# Altium PCB 1.PcbDoc (part 3 of 3)
Units mm, origin at the board's own origin, x right, y up, seen from the top; angles counter-clockwise.
Board outline 233.04 x 114.81 mm, 2 copper layers (Top Layer, Bottom Layer); 326 components, 324 nets, 1073 pads, 126 vias.
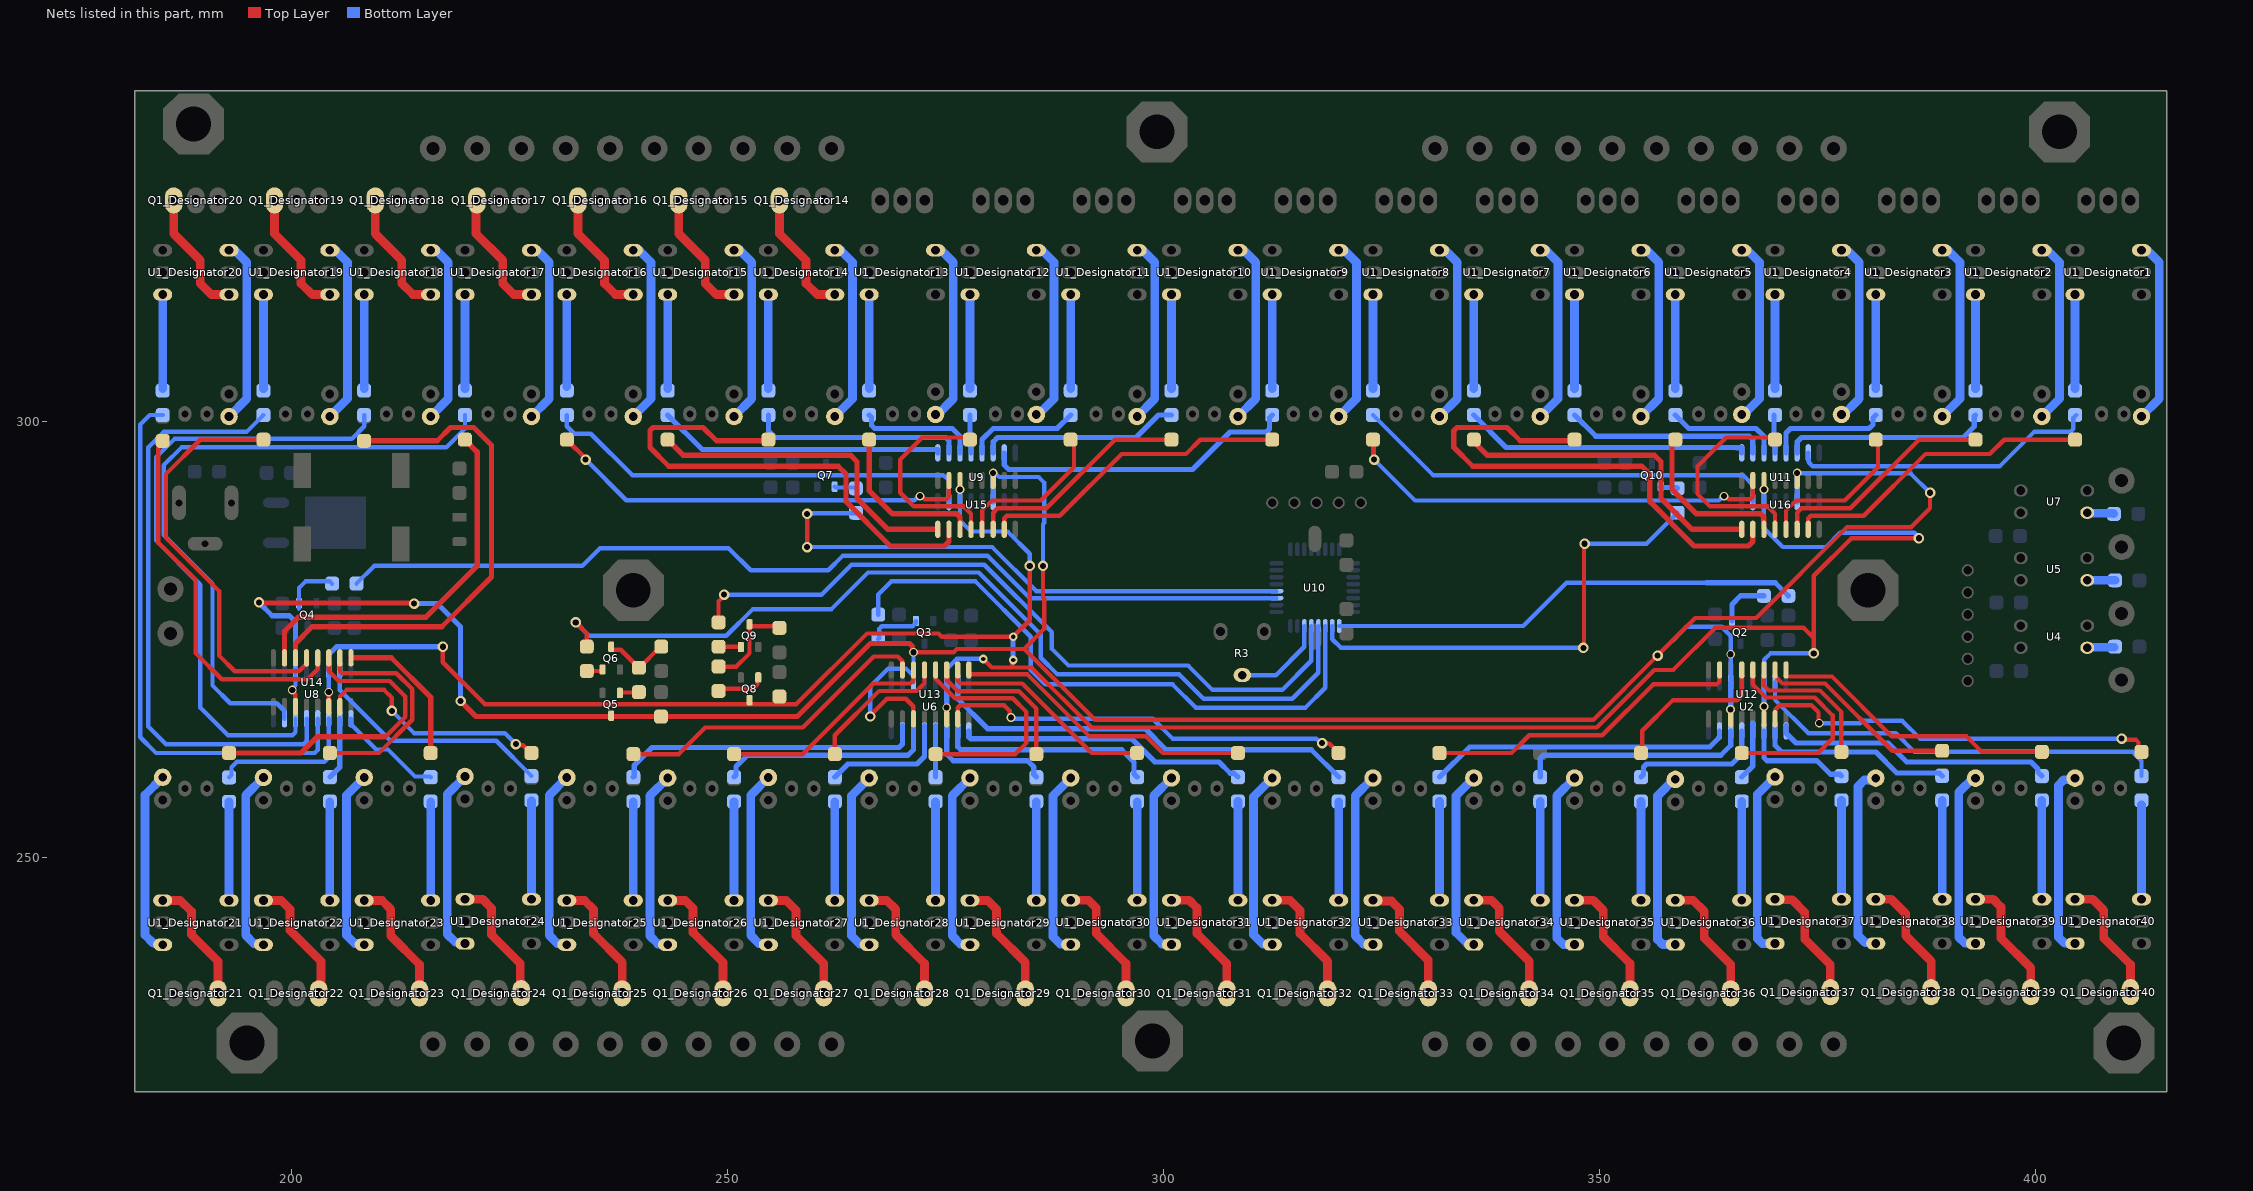
[diagram p3: the nets of this part, all layers, seen from the top]

## Via types
v1: diameter 1.2, hole 0.7, Top Layer to Bottom Layer, 83 vias
v2: diameter 1, hole 0.7, Top Layer to Bottom Layer, 40 vias
v3: diameter 1, hole 0.5, Top Layer to Bottom Layer, 3 vias

## Nets (pads, with @x,y where several pads share a name; then routed paths per layer and width w, separated by ;. In a path a pad name is that pad's centre, name@x,y a point inside that pad or via, vN(x,y) a via of type N, cw(c..) or ccw(c..) an arc to the next point about the centre after c; other vN are vias at no path point) (continued)
NetQ1_Designator14_3: Q1_Designator14.3 U1_Designator14.6 | length 14.5
  Top Layer w1: Q1_Designator14.3@255.905,325.235 255.905,321.552 258.953,318.504 258.953,315.849 260.223,314.579 U1_Designator14.6@262.255,314.579
NetQ1_Designator15_3: Q1_Designator15.3 U1_Designator15.6 | length 14.5
  Top Layer w1: Q1_Designator15.3@244.348,325.235 244.348,321.552 247.396,318.504 247.396,315.849 248.666,314.579 U1_Designator15.6@250.698,314.579
NetQ1_Designator16_3: Q1_Designator16.3 U1_Designator16.6 | length 14.5
  Top Layer w1: Q1_Designator16.3@232.791,325.235 232.791,321.552 235.839,318.504 235.839,315.849 237.109,314.579 U1_Designator16.6@239.141,314.579
NetQ1_Designator17_3: Q1_Designator17.3 U1_Designator17.6 | length 14.5
  Top Layer w1: Q1_Designator17.3@221.107,325.235 221.107,321.552 224.155,318.504 224.155,315.849 225.425,314.579 U1_Designator17.6@227.457,314.579
NetQ1_Designator18_3: Q1_Designator18.3 U1_Designator18.6 | length 14.5
  Top Layer w1: Q1_Designator18.3@209.55,325.235 209.55,321.552 212.598,318.504 212.598,315.849 213.868,314.579 U1_Designator18.6@215.9,314.579
NetQ1_Designator19_3: Q1_Designator19.3 U1_Designator19.6 | length 14.5
  Top Layer w1: Q1_Designator19.3@197.993,325.235 197.993,321.552 201.041,318.504 201.041,315.849 202.311,314.579 U1_Designator19.6@204.343,314.579
NetQ1_Designator20_3: Q1_Designator20.3 U1_Designator20.6 | length 14.5
  Top Layer w1: Q1_Designator20.3@186.436,325.235 186.436,321.552 189.484,318.504 189.484,315.849 190.754,314.579 U1_Designator20.6@192.786,314.579
NetQ1_Designator21_3: Q1_Designator21.3 U1_Designator21.6 | length 14.5
  Top Layer w1: U1_Designator21.6@185.166,245.098 187.198,245.098 188.468,243.828 188.468,241.173 191.516,238.125 Q1_Designator21.3@191.516,234.442
NetQ1_Designator22_3: Q1_Designator22.3 U1_Designator22.6 | length 14.7
  Top Layer w1: U1_Designator22.6@196.723,245.098 198.755,245.098 199.771,244.082 199.771,241.681 203.327,238.125 203.327,235.903 203.264,235.84 203.264,234.633 Q1_Designator22.3@203.073,234.442
NetQ1_Designator23_3: Q1_Designator23.3 U1_Designator23.6 | length 14.5
  Top Layer w1: U1_Designator23.6@208.28,245.098 210.312,245.098 211.328,244.082 211.328,241.046 214.63,237.744 Q1_Designator23.3@214.63,234.442
NetQ1_Designator24_3: Q1_Designator24.3 U1_Designator24.6 | length 14.5
  Top Layer w1: U1_Designator24.6@219.837,245.225 221.869,245.225 222.885,244.209 222.885,241.173 226.187,237.871 Q1_Designator24.3@226.187,234.569
NetQ1_Designator25_3: Q1_Designator25.3 U1_Designator25.6 | length 14.5
  Top Layer w1: U1_Designator25.6@231.521,245.098 233.553,245.098 234.569,244.082 234.569,241.3 237.871,237.998 Q1_Designator25.3@237.871,234.442
NetQ1_Designator26_3: Q1_Designator26.3 U1_Designator26.6 | length 14.5
  Top Layer w1: U1_Designator26.6@243.078,245.098 245.11,245.098 245.999,244.209 245.999,241.427 249.428,237.998 Q1_Designator26.3@249.428,234.442
NetQ1_Designator27_3: Q1_Designator27.3 U1_Designator27.6 | length 14.5
  Top Layer w1: U1_Designator27.6@254.635,245.098 256.667,245.098 257.81,243.955 257.81,241.046 260.985,237.871 Q1_Designator27.3@260.985,234.442
NetQ1_Designator28_3: Q1_Designator28.3 U1_Designator28.6 | length 14.5
  Top Layer w1: U1_Designator28.6@266.192,245.098 268.224,245.098 269.24,244.082 269.24,241.173 272.542,237.871 Q1_Designator28.3@272.542,234.442
NetQ1_Designator29_3: Q1_Designator29.3 U1_Designator29.6 | length 14.5
  Top Layer w1: U1_Designator29.6@277.749,245.098 279.781,245.098 280.797,244.082 280.797,241.3 284.099,237.998 Q1_Designator29.3@284.099,234.442
NetQ1_Designator30_3: Q1_Designator30.3 U1_Designator30.6 | length 14.5
  Top Layer w1: U1_Designator30.6@289.306,245.11 291.338,245.11 292.227,244.221 292.227,241.3 295.656,237.871 Q1_Designator30.3@295.656,234.454
NetQ1_Designator31_3: Q1_Designator31.3 U1_Designator31.6 | length 14.5
  Top Layer w1: U1_Designator31.6@300.863,245.11 302.895,245.11 303.784,244.221 303.784,241.3 307.213,237.871 Q1_Designator31.3@307.213,234.454
NetQ1_Designator32_3: Q1_Designator32.3 U1_Designator32.6 | length 14.5
  Top Layer w1: U1_Designator32.6@312.42,245.11 314.452,245.11 315.595,243.967 315.595,241.3 318.77,238.125 Q1_Designator32.3@318.77,234.454
NetQ1_Designator33_3: Q1_Designator33.3 U1_Designator33.6 | length 14.2
  Top Layer w1: U1_Designator33.6@324.231,245.11 324.308,245.033 326.086,245.033 327.025,244.094 327.025,241.554 330.327,238.252 Q1_Designator33.3@330.327,234.442
NetQ1_Designator34_3: Q1_Designator34.3 U1_Designator34.6 | length 14.5
  Top Layer w1: U1_Designator34.6@335.534,245.11 337.566,245.11 338.455,244.221 338.455,241.554 341.884,238.125 Q1_Designator34.3@341.884,234.454
NetQ1_Designator35_3: Q1_Designator35.3 U1_Designator35.6 | length 14.3
  Top Layer w1: U1_Designator35.6@347.345,245.11 349.25,245.11 350.393,243.967 350.393,240.919 353.441,237.871 Q1_Designator35.3@353.441,234.442
NetQ1_Designator36_3: Q1_Designator36.3 U1_Designator36.6 | length 14.5
  Top Layer w1: U1_Designator36.6@358.648,245.11 360.68,245.11 361.95,243.84 361.95,240.792 364.998,237.744 Q1_Designator36.3@364.998,234.454
NetQ1_Designator37_3: Q1_Designator37.3 U1_Designator37.6 | length 14.4
  Top Layer w1: U1_Designator37.6@370.078,245.237 370.155,245.16 372.06,245.16 373.507,243.713 373.507,240.665 376.428,237.744 Q1_Designator37.3@376.428,234.581
NetQ1_Designator38_3: Q1_Designator38.3 U1_Designator38.6 | length 14.3
  Top Layer w1: U1_Designator38.6@381.635,245.237 383.413,245.237 385.064,243.586 385.064,241.046 387.985,238.125 Q1_Designator38.3@387.985,234.581
NetQ1_Designator39_3: Q1_Designator39.3 U1_Designator39.6 | length 14.5
  Top Layer w1: U1_Designator39.6@393.065,245.237 395.097,245.237 395.986,244.348 395.986,240.792 399.415,237.363 Q1_Designator39.3@399.415,234.581
NetQ1_Designator40_3: Q1_Designator40.3 U1_Designator40.6 | length 14.5
  Top Layer w1: U1_Designator40.6@404.495,245.237 406.527,245.237 407.797,243.967 407.797,240.792 410.845,237.744 Q1_Designator40.3@410.845,234.581
NetQ2_1: Q2.1 R12.1 | length 6
  Bottom Layer w0.6: Q2.1@365.141,277.144 365.141,279.035 366.141,280.035 R12.1@368.805,280.035
NetQ3_1: Q3.1 R14.1 | length 5.9
  Bottom Layer w0.5: R14.1@267.233,275.078 267.335,275.18 267.335,276.235 267.628,276.528 271.176,276.528 271.542,276.894 Q3.1@271.542,277.144
NetQ4_1: Q4.1 R18.1 | length 6.6
  Bottom Layer w0.5: 200.803,278.541 Q4.1@200.803,279.176 200.803,280.94 201.549,281.686 204.34,281.686 R18.1@204.594,281.432
NetQ5_1: Q5.1 R19.1 | length 2.2
  Top Layer w0.5: Q5.1@237.601,268.889 237.648,268.936 239.729,268.936 R19.1@239.776,268.983
NetQ5_3: Q5.3 R16.2 U2.11 U6.11 U8.11 U9.11 U11.11 U12.11 U13.11 U14.11 U15.11 U16.11 | length 325.3
  Top Layer w0.5: v2(200.025,269.24) 200.025,269.105 200.387,268.743 200.387,267.342 U14.11@200.406,267.323 ; v1(266.319,266.192) 266.319,266.319 268.224,268.224 270.383,268.224 271.253,267.354 271.253,265.945 U13.11@271.272,265.926 ; v2(271.272,273.558) 275.875,273.558 276.256,273.939 283.972,273.939 ; v1(286.131,283.464) 286.131,279.84 286.258,279.713 286.258,276.225 283.972,273.939 ; v1(387.858,291.846) 387.858,290.068 385.699,287.909 378.333,287.909 367.919,277.495 360.934,277.495 v1(356.616,273.177) 349.25,265.811 292.1,265.811 283.972,273.939
  Top Layer w0.6: v1(196.215,279.273) 196.278,279.209 213.931,279.209 v1(213.995,279.146) ; v1(219.329,267.97) 221.107,266.192 236.601,266.192 239.776,266.192 257.937,266.192 266.319,274.574 270.806,274.574 271.157,274.223 271.157,273.673 v2(271.272,273.558)
  Bottom Layer w0.5: v2(200.025,269.24) 200.025,269.375 200.406,269.756 U8.11@200.406,271.532 ; v1(266.319,266.192) 266.319,269.624 268.38,271.685 270.422,271.685 U6.11@271.272,270.835 ; U6.11@271.272,270.135 U6.11@271.272,270.835 ; v2(271.272,273.558) U6.11@271.272,270.835 ; v2(280.416,294.132) 280.624,294.132 281.093,293.663 285.626,293.663 286.258,293.031 286.258,288.379 286.131,288.252 v1(286.131,283.464) ; v1(356.616,273.177) 359.918,276.479 363.964,276.479 365.004,275.438 365.004,273.332 v2(364.998,273.326) ; U2.11@364.998,270.135 364.998,273.32 v2@365.004,273.326 ; v2(372.618,294.132) 372.676,294.074 385.63,294.074 v1(387.858,291.846)
  Bottom Layer w0.6: v1(196.215,279.273) 197.739,277.749 199.696,277.749 200.406,277.039 U8.11@200.406,271.532 ; v1(213.995,279.146) 216.662,279.146 219.329,276.479 v1(219.329,267.97) ; U9.11@280.416,290.824 v2(280.416,294.132) ; v2(364.971,266.988) 364.998,267.014 U2.11@364.998,270.135 ; U11.11@372.618,290.824 v2(372.618,294.132)
NetQ6_1: Q6.1 R21.1 | length 1.9
  Top Layer w0.5: R21.1@233.807,271.407 235.501,271.407 235.601,271.507 Q6.1@235.601,271.579
NetQ6_3: Q6.3 R17.2 R19.2 | length 7.9
  Top Layer w0.5: Q6.3@236.601,274.179 236.601,273.958 236.701,273.858 237.701,273.858 R19.2@239.776,271.783 239.85,271.783 242.274,274.207 R17.2@242.348,274.207
NetQ7_1: Q7.1 R24.1 | length 2.5
  Bottom Layer w0.5: Q7.1@262.239,292.548 262.336,292.451 264.571,292.451 R24.1@264.668,292.354
NetQ8_1: Q8.1 R26.1 | length 5.6
  Top Layer w0.5: R26.1@248.92,269.113 249.174,269.367 252.857,269.367 253.376,269.886 253.376,270.567 Q8.1@253.476,270.667
NetQ8_3: Q8.3 R23.2 U2.14 U6.14 U8.14 U9.14 U11.14 U12.14 U13.14 U14.14 U15.14 U16.14 | length 290.2
  Top Layer w0.5: U14.14@204.216,267.323 v2(204.216,268.986) ; v1(217.297,274.193) 217.297,272.415 222.123,267.589 257.81,267.589 265.938,275.717 274.139,275.717 274.52,275.336 v3(282.702,275.336) 284.607,277.241 v1(284.607,283.464) ; v3(279.273,272.789) 280.244,271.818 282.534,271.818 ; v3(282.702,272.669) 282.609,272.576 282.609,271.994 282.534,271.919 282.534,271.818 ; v1(374.523,273.431) 374.523,275.209 ; v1(386.588,286.639) 378.841,286.639 374.523,282.321 374.523,275.209 ; 282.534,271.818 284.823,271.818 291.719,264.922 349.631,264.922 356.235,271.526 358.394,271.526 363.22,276.352 373.38,276.352 374.523,275.209
  Bottom Layer w0.5: v2(204.216,268.986) U8.14@204.216,271.532 ; U6.14@275.082,270.135 275.082,271.653 276.225,272.796 279.266,272.796 v3(279.273,272.789) ; v2(276.606,292.227) U9.14@276.606,290.824 276.606,288.671 277.876,287.401 282.067,287.401 284.607,284.861 v1(284.607,283.464) ; U2.14@368.808,270.135 368.827,270.154 368.827,272.688 369.57,273.431 v1(374.523,273.431) ; v2(368.808,292.227) U11.14@368.808,290.824 368.808,287.782 370.967,285.623 375.92,285.623 377.571,287.274 386.045,287.274 386.588,286.731 v1(386.588,286.639)
  Bottom Layer w0.6: U8.14@204.216,271.532 204.216,273.304 205.105,274.193 v1(217.297,274.193) ; v2(275.082,267.208) U6.14@275.082,270.135 ; v3(282.702,272.669) v3(282.702,275.336) ; v2(368.808,267.335) U2.14@368.808,270.135
NetQ9_1: Q9.1 R27.1 | length 2.6
  Top Layer w0.5: R27.1@248.92,274.19 248.934,274.177 251.462,274.177 Q9.1@251.476,274.163
NetQ9_3: Q9.3 R25.2 R26.2 | length 11.1
  Top Layer w0.5: R26.2@248.92,271.913 250.958,271.913 252.476,273.431 Q9.3@252.476,276.763 ; Q9.3@252.476,276.659 252.576,276.559 255.701,276.559 R25.2@255.905,276.355
NetQ10_1: Q10.1 R29.1 | length 2
  Bottom Layer w0.6: Q10.1@356.981,292.578 356.981,292.519 357.031,292.469 358.793,292.469 R29.1@358.902,292.36
NetR1_Designator1_1: R1_Designator1.1 U1_Designator1.1 | length 10.8
  Bottom Layer w1: R1_Designator1.1@404.495,303.773 U1_Designator1.1@404.495,314.579
NetR1_Designator1_2: R1_Designator1.2 U11.7 | length 35.2
  Bottom Layer w0.5: U11.7@373.888,296.424 373.888,295.697 373.938,295.647 373.938,295.352 374.416,294.874 395.839,294.874 399.796,298.831 403.948,298.831 404.299,299.182 404.299,300.444 R1_Designator1.2@404.622,300.767
NetR1_Designator2_1: R1_Designator2.1 U1_Designator2.1 | length 10.8
  Bottom Layer w1: R1_Designator2.1@393.065,303.773 U1_Designator2.1@393.065,314.579
NetR1_Designator2_2: R1_Designator2.2 U11.6 | length 23.7
  Bottom Layer w0.6: U11.6@372.618,296.424 372.618,297.688 373.126,298.196 391.668,298.196 392.933,299.461 392.933,300.635 R1_Designator2.2@393.065,300.767
NetR1_Designator3_1: R1_Designator3.1 U1_Designator3.1 | length 10.8
  Bottom Layer w1: R1_Designator3.1@381.635,303.773 U1_Designator3.1@381.635,314.579
NetR1_Designator3_2: R1_Designator3.2 U11.5 | length 13.9
  Bottom Layer w0.6: U11.5@371.348,296.424 371.348,298.704 371.856,299.212 380.873,299.212 381.312,299.651 381.312,300.444 R1_Designator3.2@381.635,300.767
NetR1_Designator4_1: R1_Designator4.1 U1_Designator4.1 | length 10.8
  Bottom Layer w1: R1_Designator4.1@370.078,303.773 U1_Designator4.1@370.078,314.579
NetR1_Designator4_2: R1_Designator4.2 U11.4 | length 4.4
  Bottom Layer w0.6: R1_Designator4.2@369.951,300.767 369.951,297.251 370.078,297.124 U11.4@370.078,296.424
NetR1_Designator5_1: R1_Designator5.1 U1_Designator5.1 | length 10.8
  Bottom Layer w1: R1_Designator5.1@358.648,303.773 U1_Designator5.1@358.648,314.579
NetR1_Designator5_2: R1_Designator5.2 U11.3 | length 13.1
  Bottom Layer w0.6: R1_Designator5.2@358.648,300.767 360.182,299.233 367.898,299.233 368.808,298.323 U11.3@368.808,296.424
NetR1_Designator6_1: R1_Designator6.1 U1_Designator6.1 | length 10.8
  Bottom Layer w1: R1_Designator6.1@347.091,303.773 U1_Designator6.1@347.091,314.579
NetR1_Designator6_2: R1_Designator6.2 U11.2 | length 23.1
  Bottom Layer w0.6: R1_Designator6.2@347.091,300.767 349.535,298.323 367.157,298.323 367.538,297.942 U11.2@367.538,296.424
NetR1_Designator7_1: R1_Designator7.1 U1_Designator7.1 | length 10.8
  Bottom Layer w1: R1_Designator7.1@335.534,303.773 U1_Designator7.1@335.534,314.579
NetR1_Designator7_2: R1_Designator7.2 U11.1 | length 32.9
  Bottom Layer w0.6: R1_Designator7.2@335.534,300.767 339.248,297.053 365.639,297.053 365.669,297.023 366.268,297.023 U11.1@366.268,296.424
NetR1_Designator8_1: R1_Designator8.1 U1_Designator8.1 | length 10.8
  Bottom Layer w1: R1_Designator8.1@323.977,303.773 U1_Designator8.1@323.977,314.579
NetR1_Designator8_2: R1_Designator8.2 U11.15 | length 48.8
  Bottom Layer w0.5: R1_Designator8.2@323.977,300.767 330.866,293.878 366.395,293.878 367.538,292.735 U11.15@367.538,290.824
NetR1_Designator9_1: R1_Designator9.1 U1_Designator9.1 | length 10.8
  Bottom Layer w1: R1_Designator9.1@312.42,303.773 U1_Designator9.1@312.42,314.579
NetR1_Designator9_2: R1_Designator9.2 U9.7 | length 35.7
  Bottom Layer w0.6: U9.7@281.686,296.424 281.686,295.021 282.194,294.513 303.276,294.513 307.594,298.831 311.746,298.831 312.097,299.182 312.097,300.444 R1_Designator9.2@312.42,300.767
NetR1_Designator10_1: R1_Designator10.1 U1_Designator10.1 | length 10.8
  Bottom Layer w1: R1_Designator10.1@300.863,303.773 U1_Designator10.1@300.863,314.579
NetR1_Designator10_2: R1_Designator10.2 U9.6 | length 23
  Bottom Layer w0.6: U9.6@280.416,296.424 280.416,297.688 280.924,298.196 296.796,298.196 299.367,300.767 R1_Designator10.2@300.863,300.767
NetR1_Designator11_1: R1_Designator11.1 U1_Designator11.1 | length 10.8
  Bottom Layer w1: R1_Designator11.1@289.306,303.773 U1_Designator11.1@289.306,314.579
NetR1_Designator11_2: R1_Designator11.2 U9.5 | length 12.8
  Bottom Layer w0.6: U9.5@279.146,296.424 279.146,297.942 280.416,299.212 287.751,299.212 R1_Designator11.2@289.306,300.767
NetR1_Designator12_1: R1_Designator12.1 U1_Designator12.1 | length 10.8
  Bottom Layer w1: R1_Designator12.1@277.749,303.773 U1_Designator12.1@277.749,314.579
NetR1_Designator12_2: R1_Designator12.2 U9.4 | length 4.4
  Bottom Layer w0.6: R1_Designator12.2@277.749,300.767 277.749,297.251 277.876,297.124 U9.4@277.876,296.424
NetR1_Designator13_1: R1_Designator13.1 U1_Designator13.1 | length 10.8
  Bottom Layer w1: R1_Designator13.1@266.192,303.773 U1_Designator13.1@266.192,314.579
NetR1_Designator13_2: R1_Designator13.2 U9.3 | length 13.9
  Bottom Layer w0.6: R1_Designator13.2@266.192,300.767 266.451,300.508 266.451,299.588 266.827,299.212 275.717,299.212 276.606,298.323 U9.3@276.606,296.424
NetR1_Designator14_1: R1_Designator14.1 U1_Designator14.1 | length 10.8
  Bottom Layer w1: R1_Designator14.1@254.635,303.773 U1_Designator14.1@254.635,314.579
NetR1_Designator14_2: R1_Designator14.2 U9.2 | length 24.4
  Bottom Layer w0.6: R1_Designator14.2@254.635,300.767 254.635,298.958 255.397,298.196 274.985,298.196 275.336,297.845 U9.2@275.336,296.424
NetR1_Designator15_1: R1_Designator15.1 U1_Designator15.1 | length 10.8
  Bottom Layer w1: R1_Designator15.1@243.078,303.773 U1_Designator15.1@243.078,314.579
NetR1_Designator15_2: R1_Designator15.2 U9.1 | length 33
  Bottom Layer w0.6: R1_Designator15.2@243.078,300.767 247.046,296.799 274.066,296.799 U9.1@274.066,296.424
NetR1_Designator16_1: R1_Designator16.1 U1_Designator16.1 | length 10.8
  Bottom Layer w1: R1_Designator16.1@231.521,304.027 U1_Designator16.1@231.521,314.833
NetR1_Designator16_2: R1_Designator16.2 U9.15 | length 50.1
  Bottom Layer w0.5: R1_Designator16.2@231.521,300.767 231.521,299.466 232.365,298.622 234.27,298.622 239.014,293.878 274.701,293.878 275.336,293.243 U9.15@275.336,290.824
NetR1_Designator17_1: R1_Designator17.1 U1_Designator17.1 | length 10.8
  Bottom Layer w1: R1_Designator17.1@219.837,303.773 U1_Designator17.1@219.837,314.579
NetR1_Designator17_2: R1_Designator17.2 U8.7 | length 75.8
  Bottom Layer w0.5: U8.7@199.136,265.932 199.117,265.951 199.117,266.846 198.247,267.716 192.913,267.716 190.881,269.748 190.881,281.432 185.293,287.02 185.293,295.021 187.325,297.053 217.678,297.053 219.837,299.212 R1_Designator17.2@219.837,300.767
NetR1_Designator18_1: R1_Designator18.1 U1_Designator18.1 | length 10.8
  Bottom Layer w1: R1_Designator18.1@208.28,303.773 U1_Designator18.1@208.28,314.579
NetR1_Designator18_2: R1_Designator18.2 U8.6 | length 71.4
  Bottom Layer w0.5: U8.6@200.406,265.932 200.406,264.384 200.055,264.033 192.659,264.033 189.484,267.208 189.484,281.305 184.404,286.385 184.404,295.91 186.525,298.031 206.845,298.031 208.28,299.466 R1_Designator18.2@208.28,300.767
NetR1_Designator19_1: R1_Designator19.1 U1_Designator19.1 | length 10.8
  Bottom Layer w1: R1_Designator19.1@196.723,303.773 U1_Designator19.1@196.723,314.579
NetR1_Designator19_2: R1_Designator19.2 U8.5 | length 68.5
  Bottom Layer w0.5: R1_Designator19.2@196.723,300.767 194.787,298.831 185.293,298.831 183.515,297.053 183.515,265.049 185.547,263.017 201.325,263.017 201.676,263.368 U8.5@201.676,265.932
NetR1_Designator20_1: R1_Designator20.1 U1_Designator20.1 | length 10.8
  Bottom Layer w1: R1_Designator20.1@185.166,303.773 U1_Designator20.1@185.166,314.579
NetR1_Designator20_2: R1_Designator20.2 U8.4 | length 63.7
  Bottom Layer w0.5: R1_Designator20.2@185.166,300.767 183.673,300.767 182.588,299.682 182.588,263.817 184.404,262.001 202.595,262.001 202.946,262.352 U8.4@202.946,265.932
NetR1_Designator21_1: R1_Designator21.1 U1_Designator21.1 | length 11.3
  Bottom Layer w1: U1_Designator21.1@192.786,245.098 R1_Designator21.1@192.786,256.41
NetR1_Designator21_2: R1_Designator21.2 U8.3 | length 17.3
  Bottom Layer w0.5: R1_Designator21.2@192.786,259.21 193.062,259.486 193.062,260.372 193.675,260.985 203.708,260.985 204.216,261.493 U8.3@204.216,265.932
NetR1_Designator22_1: R1_Designator22.1 U1_Designator22.1 | length 11.3
  Bottom Layer w1: U1_Designator22.1@204.343,245.098 R1_Designator22.1@204.343,256.41
NetR1_Designator22_2: R1_Designator22.2 U8.2 | length 7.2
  Bottom Layer w0.6: R1_Designator22.2@204.343,259.24 205.486,260.383 U8.2@205.486,265.932
NetR1_Designator23_1: R1_Designator23.1 U1_Designator23.1 | length 11.3
  Bottom Layer w1: U1_Designator23.1@215.9,245.098 R1_Designator23.1@215.9,256.41
NetR1_Designator23_2: R1_Designator23.2 U8.1 | length 12.3
  Bottom Layer w0.5: U8.1@206.756,265.932 206.756,265.259 206.802,265.213 206.846,265.213 209.66,262.399 211.014,262.399 214.1,259.312 215.828,259.312 R1_Designator23.2@215.9,259.24
NetR1_Designator24_1: R1_Designator24.1 U1_Designator24.1 | length 11.3
  Bottom Layer w1: U1_Designator24.1@227.457,245.225 R1_Designator24.1@227.457,256.537
NetR1_Designator24_2: R1_Designator24.2 U8.15 | length 28.4
  Bottom Layer w0.5: U8.15@205.486,271.532 205.486,269.215 211.303,263.398 223.426,263.398 R1_Designator24.2@227.457,259.367
NetR1_Designator25_1: R1_Designator25.1 U1_Designator25.1 | length 11.3
  Bottom Layer w1: U1_Designator25.1@239.141,245.098 R1_Designator25.1@239.141,256.41
NetR1_Designator25_2: R1_Designator25.2 U6.7 | length 35.3
  Bottom Layer w0.6: R1_Designator25.2@239.141,259.24 239.242,259.341 239.242,260.578 241.3,262.636 269.621,262.636 270.002,263.017 U6.7@270.002,265.17
NetR1_Designator26_1: R1_Designator26.1 U1_Designator26.1 | length 11.3
  Bottom Layer w1: U1_Designator26.1@250.698,245.098 R1_Designator26.1@250.698,256.41
NetR1_Designator26_2: R1_Designator26.2 U6.6 | length 25.2
  Bottom Layer w0.6: R1_Designator26.2@250.698,259.24 250.926,259.468 250.926,260.451 252.211,261.736 270.626,261.736 271.272,262.382 U6.6@271.272,265.17
NetR1_Designator27_1: R1_Designator27.1 U1_Designator27.1 | length 11.3
  Bottom Layer w1: U1_Designator27.1@262.255,245.098 R1_Designator27.1@262.255,256.41
NetR1_Designator27_2: R1_Designator27.2 U6.5 | length 14.8
  Bottom Layer w0.6: R1_Designator27.2@262.255,259.24 263.746,260.731 265.52,260.731 265.529,260.74 271.662,260.74 272.542,261.62 U6.5@272.542,265.17
NetR1_Designator28_1: R1_Designator28.1 U1_Designator28.1 | length 11.3
  Bottom Layer w1: U1_Designator28.1@273.812,245.098 R1_Designator28.1@273.812,256.41
NetR1_Designator28_2: R1_Designator28.2 U6.4 | length 5.9
  Bottom Layer w0.6: R1_Designator28.2@273.812,259.24 U6.4@273.812,265.17
NetR1_Designator29_1: R1_Designator29.1 U1_Designator29.1 | length 11.3
  Bottom Layer w1: U1_Designator29.1@285.369,245.098 R1_Designator29.1@285.369,256.41
NetR1_Designator29_2: R1_Designator29.2 U6.3 | length 15.2
  Bottom Layer w0.6: U6.3@275.082,265.17 275.082,261.874 275.844,261.112 284.353,261.112 285.078,260.387 285.078,259.531 R1_Designator29.2@285.369,259.24
NetR1_Designator30_1: R1_Designator30.1 U1_Designator30.1 | length 11.3
  Bottom Layer w1: U1_Designator30.1@296.926,245.11 R1_Designator30.1@296.926,256.422
NetR1_Designator30_2: R1_Designator30.2 U6.2 | length 25.3
  Bottom Layer w0.6: U6.2@276.352,265.17 276.352,262.733 276.703,262.382 295.148,262.382 296.571,260.959 296.571,259.595 R1_Designator30.2@296.926,259.24
NetR1_Designator31_1: R1_Designator31.1 U1_Designator31.1 | length 11.3
  Bottom Layer w1: U1_Designator31.1@308.483,245.11 R1_Designator31.1@308.483,256.44
NetR1_Designator31_2: R1_Designator31.2 U6.1 | length 33.5
  Bottom Layer w0.6: U6.1@277.622,264.535 277.622,263.835 277.805,263.652 296.291,263.652 298.958,260.985 306.302,260.985 307.609,259.678 308.045,259.678 R1_Designator31.2@308.483,259.24
NetR1_Designator32_1: R1_Designator32.1 U1_Designator32.1 | length 11.3
  Bottom Layer w1: U1_Designator32.1@320.04,245.11 R1_Designator32.1@320.04,256.422
NetR1_Designator32_2: R1_Designator32.2 U6.15 | length 50
  Bottom Layer w0.6: U6.15@276.352,270.77 276.352,268.224 279.781,264.795 280.144,264.795 280.158,264.781 281.182,264.781 281.196,264.795 297.815,264.795 300.228,262.382 316.898,262.382 R1_Designator32.2@320.04,259.24
NetR1_Designator33_1: R1_Designator33.1 U1_Designator33.1 | length 11.3
  Bottom Layer w1: U1_Designator33.1@331.597,245.11 R1_Designator33.1@331.597,256.44
NetR1_Designator33_2: R1_Designator33.2 U2.7 | length 34.7
  Bottom Layer w0.6: R1_Designator33.2@331.597,259.24 335.063,262.706 362.602,262.706 363.358,263.462 363.358,263.465 363.728,263.835 U2.7@363.728,264.535
NetR1_Designator34_1: R1_Designator34.1 U1_Designator34.1 | length 11.3
  Bottom Layer w1: U1_Designator34.1@343.154,245.11 R1_Designator34.1@343.154,256.44
NetR1_Designator34_2: R1_Designator34.2 U2.6 | length 26.2
  Bottom Layer w0.6: R1_Designator34.2@343.154,259.24 343.154,261.366 343.535,261.747 363.855,261.747 364.998,262.89 U2.6@364.998,264.535
NetR1_Designator35_1: R1_Designator35.1 U1_Designator35.1 | length 11.3
  Bottom Layer w1: U1_Designator35.1@354.711,245.11 R1_Designator35.1@354.711,256.44
NetR1_Designator35_2: R1_Designator35.2 U2.5 | length 15.8
  Bottom Layer w0.6: R1_Designator35.2@354.711,259.24 355.01,259.539 355.01,260.38 355.361,260.731 365.125,260.731 366.268,261.874 U2.5@366.268,264.535
NetR1_Designator36_1: R1_Designator36.1 U1_Designator36.1 | length 11.3
  Bottom Layer w1: U1_Designator36.1@366.268,245.11 R1_Designator36.1@366.268,256.44
NetR1_Designator36_2: R1_Designator36.2 U2.4 | length 6.7
  Bottom Layer w0.6: R1_Designator36.2@366.268,259.24 367.538,260.51 U2.4@367.538,265.418
NetR1_Designator37_1: R1_Designator37.1 U1_Designator37.1 | length 11.3
  Bottom Layer w1: U1_Designator37.1@377.698,245.237 R1_Designator37.1@377.698,256.567
NetR1_Designator37_2: R1_Designator37.2 U2.3 | length 12.8
  Bottom Layer w0.6: U2.3@368.808,264.535 368.808,261.463 369.159,261.112 374.904,261.112 376.454,259.562 377.503,259.562 R1_Designator37.2@377.698,259.367
NetR1_Designator38_1: R1_Designator38.1 U1_Designator38.1 | length 11.3
  Bottom Layer w1: U1_Designator38.1@389.255,245.237 R1_Designator38.1@389.255,256.549
NetR1_Designator38_2: R1_Designator38.2 U2.2 | length 23.2
  Bottom Layer w0.6: U2.2@370.078,265.418 370.078,262.89 370.851,262.117 381.646,262.117 384.048,259.715 388.907,259.715 R1_Designator38.2@389.255,259.367
NetR1_Designator39_1: R1_Designator39.1 U1_Designator39.1 | length 11.3
  Bottom Layer w1: U1_Designator39.1@400.685,245.237 R1_Designator39.1@400.685,256.567
NetR1_Designator39_2: R1_Designator39.2 U2.1 | length 32.5
  Bottom Layer w0.6: U2.1@371.348,265.17 371.348,264.287 372.491,263.144 383.032,263.144 385.191,260.985 399.431,260.985 400.247,260.169 400.247,259.805 R1_Designator39.2@400.685,259.367
NetR1_Designator40_1: R1_Designator40.1 U1_Designator40.1 | length 10.8
  Bottom Layer w1: U1_Designator40.1@412.115,245.237 R1_Designator40.1@412.115,256.043
NetR1_Designator40_2: R1_Designator40.2 U2.15 | length 48.7
  Bottom Layer w0.5: U2.15@370.078,270.135 370.078,268.097 373.888,264.287 383.921,264.287 386.08,262.128 411.099,262.128 412.115,261.112 R1_Designator40.2@412.115,259.367
NetR2_Designator1_1: R2_Designator1.1 U1_Designator1.4 | length 21.2
  Bottom Layer w1: R2_Designator1.1@412.115,300.588 414.147,302.62 414.147,318.301 412.827,319.622 412.192,319.622 U1_Designator1.4@412.115,319.698
NetR2_Designator2_1: R2_Designator2.1 U1_Designator2.4 | length 21.2
  Bottom Layer w1: R2_Designator2.1@400.685,300.588 402.717,302.62 402.717,318.301 401.397,319.622 400.762,319.622 U1_Designator2.4@400.685,319.698
NetR2_Designator3_1: R2_Designator3.1 U1_Designator3.4 | length 21.2
  Bottom Layer w1: R2_Designator3.1@389.255,300.588 391.287,302.62 391.287,318.301 389.967,319.622 389.332,319.622 U1_Designator3.4@389.255,319.698
NetR2_Designator4_1: R2_Designator4.1 U1_Designator4.4 | length 21.2
  Bottom Layer w1: R2_Designator4.1@377.698,300.588 379.73,302.62 379.73,318.301 378.41,319.622 377.775,319.622 U1_Designator4.4@377.698,319.698
NetR2_Designator5_1: R2_Designator5.1 U1_Designator5.4 | length 21.2
  Bottom Layer w1: R2_Designator5.1@366.268,300.588 368.3,302.62 368.3,318.301 366.98,319.622 366.345,319.622 U1_Designator5.4@366.268,319.698
NetR2_Designator6_1: R2_Designator6.1 U1_Designator6.4 | length 21.2
  Bottom Layer w1: R2_Designator6.1@354.711,300.588 356.743,302.62 356.743,318.301 355.423,319.622 354.788,319.622 U1_Designator6.4@354.711,319.698
NetR2_Designator7_1: R2_Designator7.1 U1_Designator7.4 | length 21.2
  Bottom Layer w1: R2_Designator7.1@343.154,300.588 345.186,302.62 345.186,318.301 343.866,319.622 343.231,319.622 U1_Designator7.4@343.154,319.698
NetR2_Designator8_1: R2_Designator8.1 U1_Designator8.4 | length 21.2
  Bottom Layer w1: R2_Designator8.1@331.597,300.588 333.629,302.62 333.629,318.301 332.309,319.622 331.674,319.622 U1_Designator8.4@331.597,319.698
NetR2_Designator9_1: R2_Designator9.1 U1_Designator9.4 | length 21.2
  Bottom Layer w1: R2_Designator9.1@320.04,300.588 322.072,302.62 322.072,318.301 320.752,319.622 320.117,319.622 U1_Designator9.4@320.04,319.698
NetR2_Designator10_1: R2_Designator10.1 U1_Designator10.4 | length 21.2
  Bottom Layer w1: R2_Designator10.1@308.483,300.588 310.515,302.62 310.515,318.301 309.195,319.622 308.56,319.622 U1_Designator10.4@308.483,319.698
NetR2_Designator11_1: R2_Designator11.1 U1_Designator11.4 | length 21.2
  Bottom Layer w1: R2_Designator11.1@296.926,300.588 298.958,302.62 298.958,318.301 297.638,319.622 297.003,319.622 U1_Designator11.4@296.926,319.698
NetR2_Designator12_1: R2_Designator12.1 U1_Designator12.4 | length 21.2
  Bottom Layer w1: R2_Designator12.1@285.369,300.588 287.401,302.62 287.401,318.301 286.081,319.622 285.446,319.622 U1_Designator12.4@285.369,319.698
NetR2_Designator13_1: R2_Designator13.1 U1_Designator13.4 | length 21.2
  Bottom Layer w1: R2_Designator13.1@273.812,300.588 275.844,302.62 275.844,318.301 274.524,319.622 273.889,319.622 U1_Designator13.4@273.812,319.698
NetR2_Designator14_1: R2_Designator14.1 U1_Designator14.4 | length 21.2
  Bottom Layer w1: R2_Designator14.1@262.255,300.588 264.287,302.62 264.287,318.301 262.967,319.622 262.332,319.622 U1_Designator14.4@262.255,319.698
NetR2_Designator15_1: R2_Designator15.1 U1_Designator15.4 | length 21.2
  Bottom Layer w1: R2_Designator15.1@250.698,300.588 252.73,302.62 252.73,318.301 251.41,319.622 250.775,319.622 U1_Designator15.4@250.698,319.698
NetR2_Designator16_1: R2_Designator16.1 U1_Designator16.4 | length 21.2
  Bottom Layer w1: R2_Designator16.1@239.141,300.588 241.173,302.62 241.173,318.301 239.853,319.622 239.218,319.622 U1_Designator16.4@239.141,319.698
NetR2_Designator17_1: R2_Designator17.1 U1_Designator17.4 | length 21.2
  Bottom Layer w1: R2_Designator17.1@227.457,300.588 229.489,302.62 229.489,318.301 228.169,319.622 227.534,319.622 U1_Designator17.4@227.457,319.698
NetR2_Designator18_1: R2_Designator18.1 U1_Designator18.4 | length 21.2
  Bottom Layer w1: R2_Designator18.1@215.9,300.588 217.932,302.62 217.932,318.301 216.612,319.622 215.977,319.622 U1_Designator18.4@215.9,319.698
NetR2_Designator19_1: R2_Designator19.1 U1_Designator19.4 | length 21.2
  Bottom Layer w1: R2_Designator19.1@204.343,300.588 206.375,302.62 206.375,318.301 205.055,319.622 204.42,319.622 U1_Designator19.4@204.343,319.698
NetR2_Designator20_1: R2_Designator20.1 U1_Designator20.4 | length 21.2
  Bottom Layer w1: R2_Designator20.1@192.786,300.588 194.818,302.62 194.818,318.301 193.498,319.622 192.863,319.622 U1_Designator20.4@192.786,319.698
NetR2_Designator21_1: R2_Designator21.1 U1_Designator21.4 | length 21.4
  Bottom Layer w1: U1_Designator21.4@185.166,240.108 185.089,240.184 184.073,240.184 183.134,241.124 183.134,257.186 R2_Designator21.1@185.166,259.218
NetR2_Designator22_1: R2_Designator22.1 U1_Designator22.4 | length 21.4
  Bottom Layer w1: U1_Designator22.4@196.723,240.083 196.646,240.159 195.63,240.159 194.691,241.099 194.691,257.161 R2_Designator22.1@196.723,259.193
NetR2_Designator23_1: R2_Designator23.1 U1_Designator23.4 | length 21.4
  Bottom Layer w1: U1_Designator23.4@208.28,240.083 208.203,240.159 207.187,240.159 206.248,241.099 206.248,257.161 R2_Designator23.1@208.28,259.193
NetR2_Designator24_1: R2_Designator24.1 U1_Designator24.4 | length 21.4
  Bottom Layer w1: U1_Designator24.4@219.837,240.21 219.76,240.286 218.744,240.286 217.805,241.226 217.805,257.288 R2_Designator24.1@219.837,259.32
NetR2_Designator25_1: R2_Designator25.1 U1_Designator25.4 | length 21.4
  Bottom Layer w1: U1_Designator25.4@231.521,240.083 231.444,240.159 230.428,240.159 229.489,241.099 229.489,257.161 R2_Designator25.1@231.521,259.193
NetR2_Designator26_1: R2_Designator26.1 U1_Designator26.4 | length 21.4
  Bottom Layer w1: U1_Designator26.4@243.078,240.03 243.001,240.106 241.985,240.106 241.046,241.046 241.046,257.108 R2_Designator26.1@243.078,259.14
NetR2_Designator27_1: R2_Designator27.1 U1_Designator27.4 | length 21.4
  Bottom Layer w1: U1_Designator27.4@254.635,240.083 254.558,240.159 253.542,240.159 252.603,241.099 252.603,257.161 R2_Designator27.1@254.635,259.193
NetR2_Designator28_1: R2_Designator28.1 U1_Designator28.4 | length 21.4
  Bottom Layer w1: U1_Designator28.4@266.192,240.03 266.115,240.106 265.099,240.106 264.16,241.046 264.16,257.108 R2_Designator28.1@266.192,259.14
NetR2_Designator29_1: R2_Designator29.1 U1_Designator29.4 | length 21.4
  Bottom Layer w1: U1_Designator29.4@277.749,240.03 277.672,240.107 276.656,240.107 275.717,241.046 275.717,257.108 R2_Designator29.1@277.749,259.14
NetR2_Designator30_1: R2_Designator30.1 U1_Designator30.4 | length 21.5
  Bottom Layer w1: U1_Designator30.4@289.306,240.03 289.272,240.064 288.129,240.064 287.274,240.919 287.274,257.108 R2_Designator30.1@289.306,259.14
NetR2_Designator31_1: R2_Designator31.1 U1_Designator31.4 | length 21.4
  Bottom Layer w1: U1_Designator31.4@300.863,240.03 300.786,240.107 299.77,240.107 298.831,241.046 298.831,257.108 R2_Designator31.1@300.863,259.14
NetR2_Designator32_1: R2_Designator32.1 U1_Designator32.4 | length 21.5
  Bottom Layer w1: U1_Designator32.4@312.42,240.03 312.343,240.107 311.327,240.107 310.261,241.173 310.261,256.981 R2_Designator32.1@312.42,259.14
NetR2_Designator33_1: R2_Designator33.1 U1_Designator33.4 | length 21.4
  Bottom Layer w1: U1_Designator33.4@323.977,240.03 323.9,240.107 322.884,240.107 321.945,241.046 321.945,257.108 R2_Designator33.1@323.977,259.14
NetR2_Designator34_1: R2_Designator34.1 U1_Designator34.4 | length 21.2
  Bottom Layer w1: U1_Designator34.4@335.534,240.03 335.457,240.107 334.822,240.107 333.502,241.427 333.502,257.108 R2_Designator34.1@335.534,259.14
NetR2_Designator35_1: R2_Designator35.1 U1_Designator35.4 | length 21.5
  Bottom Layer w1: U1_Designator35.4@347.091,240.03 345.821,240.03 345.059,240.792 345.059,257.108 R2_Designator35.1@347.091,259.14
NetR2_Designator36_1: R2_Designator36.1 U1_Designator36.4 | length 21.6
  Bottom Layer w1: U1_Designator36.4@358.648,240.03 357.202,240.03 356.616,240.616 356.616,257.108 R2_Designator36.1@358.648,259.14
NetR2_Designator37_1: R2_Designator37.1 U1_Designator37.4 | length 21.6
  Bottom Layer w1: U1_Designator37.4@370.078,240.157 368.632,240.157 368.046,240.743 368.046,257.235 R2_Designator37.1@370.078,259.267
NetR2_Designator38_1: R2_Designator38.1 U1_Designator38.4 | length 21.7
  Bottom Layer w1: R2_Designator38.1@381.411,259.11 381.352,259.11 381.147,258.905 380.317,258.905 379.611,258.199 379.611,241.038 380.415,240.234 381.558,240.234 U1_Designator38.4@381.635,240.157
NetR2_Designator39_1: R2_Designator39.1 U1_Designator39.4 | length 21.2
  Bottom Layer w1: R2_Designator39.1@392.841,259.169 391.16,257.488 391.16,240.889 391.873,240.176 393.046,240.176 U1_Designator39.4@393.065,240.157
NetR2_Designator40_1: R2_Designator40.1 U1_Designator40.4 | length 21.8
  Bottom Layer w1: R2_Designator40.1@404.271,259.267 404.271,259.169 404.033,258.931 403.201,258.931 402.59,258.321 402.59,240.889 403.303,240.176 404.476,240.176 U1_Designator40.4@404.495,240.157
NetR3_2: R3.2 U10.14 | length 10.8
  Bottom Layer w0.5: R3.2@308.991,270.931 312.841,270.931 316.103,274.193 U10.14@316.103,276.569
NetR5_2: R5.2 U4.1 | length 3.1
  Bottom Layer w1: U4.1@405.892,274.066 405.955,274.13 R5.2@409.001,274.13
NetR7_1: R7.1 U5.1 | length 3.2
  Bottom Layer w1: U5.1@405.892,281.817 405.894,281.815 409.062,281.815 R7.1@409.064,281.813
NetR10_1: R10.1 U7.1 | length 3.1
  Bottom Layer w1: U7.1@405.892,289.56 405.955,289.496 408.874,289.496 R10.1@408.937,289.433
NetR12_2: R12.2 U10.9 | length 54.2
  Bottom Layer w0.5: U10.9@320.103,276.569 341.212,276.569 346.169,281.526 362.221,281.526
  Bottom Layer w0.6: 362.221,281.526 370.114,281.526 R12.2@371.605,280.035
NetR14_2: R14.2 U10.11 | length 70.5
  Bottom Layer w0.5: R14.2@267.233,277.878 267.233,280.187 268.732,281.686 278.384,281.686 284.734,275.336 284.734,271.526 286.385,269.875 300.99,269.875 303.657,267.208 316.23,267.208 318.503,269.481 U10.11@318.503,276.569
NetR18_2: R18.2 U10.19 | length 110.9
  Bottom Layer w0.5: R18.2@207.394,281.432 209.426,283.464 233.299,283.464 235.331,285.496 250.063,285.496 252.603,282.956 261.493,282.956 263.144,284.607 279.781,284.607 284.619,279.769 U10.19@312.903,279.769
NetR21_2: R21.2 U10.12 | length 106.3
  Top Layer w0.5: v1(232.537,276.987) 233.807,275.717 R21.2@233.807,274.207
  Bottom Layer w0.5: v1(232.537,276.987) 234.061,275.463 249.809,275.463 252.857,278.511 261.874,278.511 266.065,282.702 278.765,282.702 285.877,275.59 285.877,272.923 287.782,271.018 301.752,271.018 304.546,268.224 314.706,268.224 317.703,271.221 U10.12@317.703,276.569
NetR24_2: R24.2 U10.20 | length 65.4
  Top Layer w0.5: v1(259.08,285.623) v1(259.08,289.433)
  Bottom Layer w0.5: v1(259.08,285.623) 280.289,285.623 285.343,280.569 U10.20@312.903,280.569 ; v1(259.08,289.433) 259.141,289.494 264.607,289.494 R24.2@264.668,289.554
NetR27_2: R27.2 U10.13 | length 84.6
  Top Layer w0.5: R27.2@248.92,276.99 248.92,279.392 249.555,280.027 v1(249.555,280.162)
  Bottom Layer w0.5: v1(249.555,280.162) 260.731,280.162 264.16,283.591 279.4,283.591 287.147,275.844 287.147,273.939 289.052,272.034 302.768,272.034 305.562,269.24 313.563,269.24 316.903,272.58 U10.13@316.903,276.569
NetR29_2: R29.2 U10.10 | length 54.9
  Top Layer w0.5: v1(348.107,274.066) 348.171,274.13 348.171,285.94 v1(348.234,286.004)
  Bottom Layer w0.5: U10.10@319.303,276.569 319.303,275.057 320.294,274.066 v1(348.107,274.066) ; v1(348.234,286.004) 355.346,286.004 R29.2@358.902,289.56
NetR30_2: R30.2 U12.15 | length 46.8
  Top Layer w0.5: U12.15@370.078,265.926 370.097,265.945 370.097,266.973 370.6,267.476 374.255,267.476 375.062,266.669 375.062,265.526 v2(375.158,265.43) ; v1(409.829,263.652) 409.976,263.505 411.477,263.505 411.769,263.212 411.769,262.477 R30.2@412.115,262.131
  Bottom Layer w0.5: v2(375.158,265.43) 379.861,265.43 380.115,265.684 384.683,265.684 386.715,263.652 v1(409.829,263.652)
NetR31_2: R31.2 U12.1 | length 32.9
  Top Layer w0.5: U12.1@371.348,270.77 376.617,270.77 383.481,263.906 392.049,263.906 393.824,262.131 R31.2@400.685,262.131
NetR32_2: R32.2 U12.2 | length 23.4
  Top Layer w0.5: U12.2@370.078,271.526 370.111,271.493 370.111,270.793 370.934,269.97 375.825,269.97 383.534,262.261 R32.2@389.255,262.261
NetR33_2: R33.2 U12.3 | length 15.7
  Top Layer w0.5: U12.3@368.808,270.77 368.808,269.748 369.386,269.17 375.228,269.17 377.698,266.7 R33.2@377.698,262.131
NetR34_2: R34.2 U12.4 | length 25.3
  Top Layer w0.5: R34.2@366.268,262.004 375.034,262.004 376.682,263.652 376.682,266.319 374.631,268.37 369.043,268.37 367.538,269.875 U12.4@367.538,270.77
NetR35_2: R35.2 U12.5 | length 17.9
  Top Layer w0.5: R35.2@354.711,262.004 354.86,262.153 354.86,264.563 358.335,268.038 365.74,268.038 366.268,268.566 U12.5@366.268,270.77
NetR37_2: R37.2 U12.7 | length 36.1
  Top Layer w0.5: R37.2@331.597,262.001 339.852,262.001 341.884,264.033 350.266,264.033 356.108,269.875 363.417,269.875 363.71,270.168 363.71,270.752 U12.7@363.728,270.77
NetR38_2: R38.2 U13.15 | length 47.7
  Top Layer w0.5: U13.15@276.352,265.926 276.352,267.183 276.645,267.476 281.672,267.476 282.314,266.834 282.314,266.199 v2(282.448,266.065) ; v1(318.135,263.144) 318.188,263.091 318.953,263.091 R38.2@320.04,262.004
  Bottom Layer w0.5: v2(282.448,266.065) 282.582,265.931 298.711,265.931 300.99,263.652 317.468,263.652 317.976,263.144 v1(318.135,263.144)
NetR39_2: R39.2 U13.1 | length 35.1
  Top Layer w0.5: U13.1@277.622,271.526 277.622,271.064 277.668,271.018 284.353,271.018 291.465,263.906 297.942,263.906 299.844,262.004 R39.2@308.483,262.004
NetR40_2: R40.2 U13.2 | length 25.2
  Top Layer w0.5: U13.2@276.352,271.526 276.371,271.507 276.371,270.269 276.664,269.976 283.744,269.976 291.716,262.004 R40.2@296.926,262.004
NetR41_2: R41.2 U13.3 | length 18
  Top Layer w0.5: U13.3@275.082,271.526 275.101,271.507 275.101,270.364 276.389,269.076 283.374,269.076 285.369,267.081 R41.2@285.369,261.877
NetR42_2: R42.2 U13.4 | length 27.5
  Top Layer w0.5: R42.2@273.812,261.877 282.959,261.877 284.226,263.144 284.226,266.7 282.65,268.276 276.046,268.276 273.831,270.491 273.831,271.507 U13.4@273.812,271.526
NetR43_2: R43.2 U13.5 | length 16.4
  Top Layer w0.5: R43.2@262.255,261.88 262.255,264.033 267.335,269.113 271.653,269.113 272.542,270.002 U13.5@272.542,271.526
NetR44_2: R44.2 U13.6 | length 25.3
  Top Layer w0.5: R44.2@250.698,261.88 258.578,261.88 266.674,269.976 270.92,269.976 271.239,270.295 271.239,270.723 271.253,270.736 271.253,271.507 U13.6@271.272,271.526
NetR45_2: R45.2 U13.7 | length 36.7
  Top Layer w0.5: R45.2@239.141,261.88 244.354,261.88 247.396,264.922 258.572,264.922 266.726,273.076 269.468,273.076 269.983,272.561 269.983,271.545 U13.7@270.002,271.526
NetR46_2: R46.2 U14.15 | length 27.3
  Top Layer w0.5: U14.15@205.486,267.323 205.501,267.338 205.501,268.493 206.248,269.24 210.566,269.24 211.455,268.351 v1(211.455,266.827) ; v1(225.679,263.017) 225.813,262.883 226.5,262.883 227.376,262.007 R46.2@227.457,262.007
  Bottom Layer w0.5: v1(211.455,266.827) 213.995,264.287 224.409,264.287 v1(225.679,263.017)
NetR47_2: R47.2 U14.1 | length 17.4
  Top Layer w0.6: U14.1@206.756,272.923 211.387,272.923 215.9,268.41 R47.2@215.9,262.004
NetR48_2: R48.2 U14.2 | length 25.2
  Top Layer w0.5: R48.2@204.343,262.004 209.972,262.004 213.779,265.811 213.779,269.329 211.963,271.145 205.779,271.145 205.486,271.438 U14.2@205.486,272.923
NetR49_2: R49.2 U14.3 | length 35.7
  Top Layer w0.5: U14.3@204.216,272.923 204.216,271.399 205.359,270.256 211.201,270.256 212.979,268.478 212.979,266.142 210.657,263.821
  Top Layer w0.6: R49.2@192.786,262.004 201.024,262.004 202.876,263.856 210.622,263.856
NetR50_2: R50.2 U14.4 | length 43.3
  Top Layer w0.5: R50.2@185.166,297.809 184.709,297.352 184.709,297.017 184.658,296.966 184.658,286.131 188.976,281.813 188.976,273.431 191.935,270.472 201.765,270.472 202.946,271.653 U14.4@202.946,272.923
NetR51_2: R51.2 U14.5 | length 48
  Top Layer w0.5: R51.2@196.723,297.939 189.481,297.939 185.547,294.005 185.547,286.673 191.643,280.577 191.643,273.177 193.447,271.373 200.758,271.373 200.949,271.564 200.99,271.564 201.676,272.25 U14.5@201.676,272.923
NetR52_2: R52.2 U14.6 | length 58.5
  Top Layer w0.6: U14.6@200.406,272.923 200.406,274.574 202.311,276.479 217.17,276.479 222.885,282.194 222.885,297.291 220.837,299.339 218.186,299.339 216.656,297.809 R52.2@208.28,297.809
NetR53_2: R53.2 U14.7 | length 43.3
  Top Layer w0.6: U14.7@199.136,272.923 199.136,275.971 200.725,277.56 215.33,277.56 221.234,283.464 221.234,296.542 R53.2@219.837,297.939
NetR54_2: R54.2 U15.15 | length 49.1
  Top Layer w0.5: R54.2@231.521,297.939 233.68,295.78 v1(233.68,295.656) ; v2(272.034,291.465) 272.223,291.465 272.583,291.105 275.043,291.105 275.336,291.398 U15.15@275.336,293.255
  Bottom Layer w0.5: v1(233.68,295.656) 238.332,291.004 271.384,291.004 271.845,291.465 v2(272.034,291.465)
NetR55_2: R55.2 U15.1 | length 37.7
  Top Layer w0.6: R55.2@243.078,297.939 244.853,296.164 264.033,296.164 264.795,295.402 264.795,291.211 268.351,287.655 U15.1@274.066,287.655
NetR56_2: R56.2 U15.2 | length 59
  Top Layer w0.6: R56.2@254.889,297.812 248.669,297.812 247.142,299.339 241.397,299.339 241.046,298.988 241.046,297.053 243.205,294.894 262.636,294.894 263.525,294.005 263.525,290.83 268.605,285.75 274.828,285.75 275.336,286.258 U15.2@275.336,287.655
NetR57_2: R57.2 U15.3 | length 18.7
  Top Layer w0.6: R57.2@266.192,297.685 266.192,292.1 268.859,289.433 276.225,289.433 276.606,289.052 U15.3@276.606,287.655
NetR58_2: R58.2 U15.4 | length 23.6
  Top Layer w0.5: R58.2@277.622,298.193 272.285,298.193 269.748,295.656 269.748,291.846 271.311,290.283 277.026,290.283 277.876,289.433 U15.4@277.876,287.655
NetR59_2: R59.2 U15.5 | length 18.1
  Top Layer w0.5: U15.5@279.146,287.655 279.146,289.814 280.289,290.957 285.877,290.957 289.687,294.767 R59.2@289.687,298.066
NetR60_2: R60.2 U15.6 | length 25.9
  Top Layer w0.5: U15.6@280.416,287.655 280.416,289.56 280.924,290.068 286.512,290.068 294.383,297.939 R60.2@300.99,297.939
NetR61_2: R61.2 U15.7 | length 35.7
  Top Layer w0.5: U15.7@281.686,287.655 281.686,288.912 281.979,289.205 288.062,289.205 295.148,296.291 302.514,296.291 304.162,297.939 R61.2@312.42,297.939
NetR62_2: R62.2 U16.15 | length 50.1
  Top Layer w0.5: v2(364.236,291.465) 364.425,291.465 364.785,291.105 367.245,291.105 367.538,291.398 U16.15@367.538,293.255
  Top Layer w0.6: R62.2@323.977,297.939 324.041,297.876 324.041,295.719 v1(324.104,295.656)
  Bottom Layer w0.5: v1(324.104,295.656) 328.803,290.957 363.62,290.957 364.128,291.465 v2(364.236,291.465)
NetR63_2: R63.2 U16.1 | length 37.7
  Top Layer w0.6: R63.2@335.28,297.939 337.055,296.164 356.235,296.164 356.997,295.402 356.997,291.211 360.553,287.655 U16.1@366.268,287.655
NetR64_2: R64.2 U16.2 | length 59
  Top Layer w0.6: R64.2@347.091,297.812 340.871,297.812 339.344,299.339 333.599,299.339 333.248,298.988 333.248,297.053 335.407,294.894 354.838,294.894 355.727,294.005 355.727,290.83 360.807,285.75 367.03,285.75 367.538,286.258 U16.2@367.538,287.655
NetR65_2: R65.2 U16.3 | length 18.5
  Top Layer w0.6: R65.2@358.267,297.431 358.267,292.227 361.061,289.433 368.427,289.433 368.808,289.052 U16.3@368.808,287.655
NetR66_2: R66.2 U16.4 | length 24.8
  Top Layer w0.5: R66.2@369.824,298.193 364.487,298.193 361.188,294.894 361.188,291.719 362.624,290.283 369.228,290.283 370.078,289.433 U16.4@370.078,287.655
NetR67_2: R67.2 U16.5 | length 18.1
  Top Layer w0.5: U16.5@371.348,287.655 371.348,289.814 372.491,290.957 378.079,290.957 381.889,294.767 R67.2@381.889,298.066
NetR68_2: R68.2 U16.6 | length 25.9
  Top Layer w0.5: U16.6@372.618,287.655 372.618,289.56 373.126,290.068 378.714,290.068 386.585,297.939 R68.2@393.192,297.939
NetR69_2: R69.2 U16.7 | length 35.7
  Top Layer w0.5: U16.7@373.888,287.655 373.888,288.912 374.181,289.205 380.264,289.205 387.35,296.291 394.716,296.291 396.364,297.939 R69.2@404.622,297.939
pads on no net: J3.6 R36.2 U1_Designator1.3 U1_Designator1.5 U1_Designator2.3 U1_Designator2.5 U1_Designator3.3 U1_Designator3.5 U1_Designator4.3 U1_Designator4.5 U1_Designator5.3 U1_Designator5.5 U1_Designator6.3 U1_Designator6.5 U1_Designator7.3 U1_Designator7.5 U1_Designator8.3 U1_Designator8.5 U1_Designator9.3 U1_Designator9.5 U1_Designator10.3 U1_Designator10.5 U1_Designator11.3 U1_Designator11.5 U1_Designator12.3 U1_Designator12.5 U1_Designator13.3 U1_Designator13.5 U1_Designator14.3 U1_Designator14.5 U1_Designator15.3 U1_Designator15.5 U1_Designator16.3 U1_Designator16.5 U1_Designator17.3 U1_Designator17.5 U1_Designator18.3 U1_Designator18.5 U1_Designator19.3 U1_Designator19.5 U1_Designator20.3 U1_Designator20.5 U1_Designator21.3 U1_Designator21.5 U1_Designator22.3 U1_Designator22.5 U1_Designator23.3 U1_Designator23.5 U1_Designator24.3 U1_Designator24.5 U1_Designator25.3 U1_Designator25.5 U1_Designator26.3 U1_Designator26.5 U1_Designator27.3 U1_Designator27.5 U1_Designator28.3 U1_Designator28.5 U1_Designator29.3 U1_Designator29.5 U1_Designator30.3 U1_Designator30.5 U1_Designator31.3 U1_Designator31.5 U1_Designator32.3 U1_Designator32.5 U1_Designator33.3 U1_Designator33.5 U1_Designator34.3 U1_Designator34.5 U1_Designator35.3 U1_Designator35.5 U1_Designator36.3 U1_Designator36.5 U1_Designator37.3 U1_Designator37.5 U1_Designator38.3 U1_Designator38.5 U1_Designator39.3 U1_Designator39.5 U1_Designator40.3 U1_Designator40.5 U2.9 U6.9 U8.9 U9.9 U10.15 U10.18 U10.21 U10.22 U10.25 U10.26 U10.27 U10.28 U10.29 U10.30 U11.9 U12.6 U12.9 U13.9 U14.9 U15.9 U16.9
copper on no net: | length 26.4
  Top Layer w0.5: 343.154,262.001 350.647,262.001 357.505,268.859 364.705,268.859 364.998,269.152 364.998,270.77

## Keep-outs
Keep-Out Layer:
  the board outline again, w0.254

## Text inside footprints (layer, text, board x,y; h text height)
D2: Top Overlay "K" at 406.432,257.167 h0.8 r180
D3: Top Overlay "K" at 395.002,257.167 h0.8 r180
D4: Top Overlay "K" at 383.445,257.167 h0.8 r180
D5: Top Overlay "K" at 372.015,257.137 h0.8 r180
D6: Top Overlay "K" at 360.585,257.137 h0.8 r180
D7: Top Overlay "K" at 348.901,257.137 h0.8 r180
D8: Top Overlay "K" at 337.471,257.137 h0.8 r180
D9: Top Overlay "K" at 326.168,257.137 h0.8 r180
D10: Top Overlay "K" at 314.23,257.137 h0.8 r180
D11: Top Overlay "K" at 302.8,257.137 h0.8 r180
D12: Top Overlay "K" at 291.116,257.137 h0.8 r180
D13: Top Overlay "K" at 279.686,257.137 h0.8 r180
D14: Top Overlay "K" at 268.129,257.137 h0.8 r180
D15: Top Overlay "K" at 256.572,257.137 h0.8 r180
D16: Top Overlay "K" at 244.888,257.137 h0.8 r180
D17: Top Overlay "K" at 233.458,257.137 h0.8 r180
D18: Top Overlay "K" at 221.774,257.137 h0.8 r180
D19: Top Overlay "K" at 210.217,257.137 h0.8 r180
D20: Top Overlay "K" at 198.66,257.137 h0.8 r180
D21: Top Overlay "K" at 186.976,257.137 h0.8 r180
D22: Top Overlay "K" at 190.976,301.696 h0.8
D23: Top Overlay "K" at 202.533,301.696 h0.8
D24: Top Overlay "K" at 214.09,301.696 h0.8
D25: Top Overlay "K" at 225.748,301.696 h0.8
D26: Top Overlay "K" at 237.331,301.696 h0.8
D27: Top Overlay "K" at 248.888,301.696 h0.8
D28: Top Overlay "K" at 260.318,301.696 h0.8
D29: Top Overlay "K" at 272.129,301.696 h0.8
D30: Top Overlay "K" at 283.94,301.696 h0.8
D31: Top Overlay "K" at 295.497,301.696 h0.8
D32: Top Overlay "K" at 306.546,301.696 h0.8
D33: Top Overlay "K" at 318.103,301.696 h0.8
D34: Top Overlay "K" at 329.877,301.696 h0.8
D35: Top Overlay "K" at 341.217,301.696 h0.8
D36: Top Overlay "K" at 352.901,301.696 h0.8
D37: Top Overlay "K" at 364.585,301.696 h0.8
D38: Top Overlay "K" at 375.761,301.696 h0.8
D39: Top Overlay "K" at 387.445,301.696 h0.8
D40: Top Overlay "K" at 398.621,301.696 h0.8
D41: Top Overlay "K" at 410.813,301.696 h0.8
Q1_Designator1: Top Overlay "1" at 412.242,321.31 h1.02 r180; Top Overlay "3" at 404.876,321.31 h1.02 r180
Q1_Designator2: Top Overlay "3" at 393.446,321.31 h1.02 r180; Top Overlay "1" at 400.812,321.31 h1.02 r180
Q1_Designator3: Top Overlay "3" at 382.016,321.31 h1.02 r180; Top Overlay "1" at 389.382,321.31 h1.02 r180
Q1_Designator4: Top Overlay "3" at 370.459,321.31 h1.02 r180; Top Overlay "1" at 377.825,321.31 h1.02 r180
Q1_Designator5: Top Overlay "3" at 359.029,321.31 h1.02 r180; Top Overlay "1" at 366.395,321.31 h1.02 r180
Q1_Designator6: Top Overlay "3" at 347.472,321.31 h1.02 r180; Top Overlay "1" at 354.838,321.31 h1.02 r180
Q1_Designator7: Top Overlay "3" at 335.915,321.31 h1.02 r180; Top Overlay "1" at 343.281,321.31 h1.02 r180
Q1_Designator8: Top Overlay "3" at 324.358,321.31 h1.02 r180; Top Overlay "1" at 331.724,321.31 h1.02 r180
Q1_Designator9: Top Overlay "3" at 312.801,321.31 h1.02 r180; Top Overlay "1" at 320.167,321.31 h1.02 r180
Q1_Designator10: Top Overlay "3" at 301.244,321.31 h1.02 r180; Top Overlay "1" at 308.61,321.31 h1.02 r180
Q1_Designator11: Top Overlay "1" at 297.053,321.31 h1.02 r180; Top Overlay "3" at 289.687,321.31 h1.02 r180
Q1_Designator12: Top Overlay "1" at 285.496,321.31 h1.02 r180; Top Overlay "3" at 278.13,321.31 h1.02 r180
Q1_Designator13: Top Overlay "3" at 266.573,321.31 h1.02 r180; Top Overlay "1" at 273.939,321.31 h1.02 r180
Q1_Designator14: Top Overlay "3" at 255.016,321.31 h1.02 r180; Top Overlay "1" at 262.382,321.31 h1.02 r180
Q1_Designator15: Top Overlay "1" at 250.825,321.31 h1.02 r180; Top Overlay "3" at 243.459,321.31 h1.02 r180
Q1_Designator16: Top Overlay "3" at 231.902,321.31 h1.02 r180; Top Overlay "1" at 239.268,321.31 h1.02 r180
Q1_Designator17: Top Overlay "3" at 220.319,321.31 h1.02 r180; Top Overlay "1" at 227.685,321.31 h1.02 r180
Q1_Designator18: Top Overlay "3" at 208.661,321.31 h1.02 r180; Top Overlay "1" at 216.027,321.31 h1.02 r180
Q1_Designator19: Top Overlay "3" at 197.104,321.31 h1.02 r180; Top Overlay "1" at 204.47,321.31 h1.02 r180
Q1_Designator20: Top Overlay "3" at 185.547,321.31 h1.02 r180; Top Overlay "1" at 192.913,321.31 h1.02 r180
Q1_Designator21: Top Overlay "3" at 192.405,238.506 h1.02; Top Overlay "1" at 185.039,238.506 h1.02
Q1_Designator22: Top Overlay "3" at 203.962,238.506 h1.02; Top Overlay "1" at 196.596,238.506 h1.02